# EAGLE board Arduino-SMD (EAGLE 6.6.0)
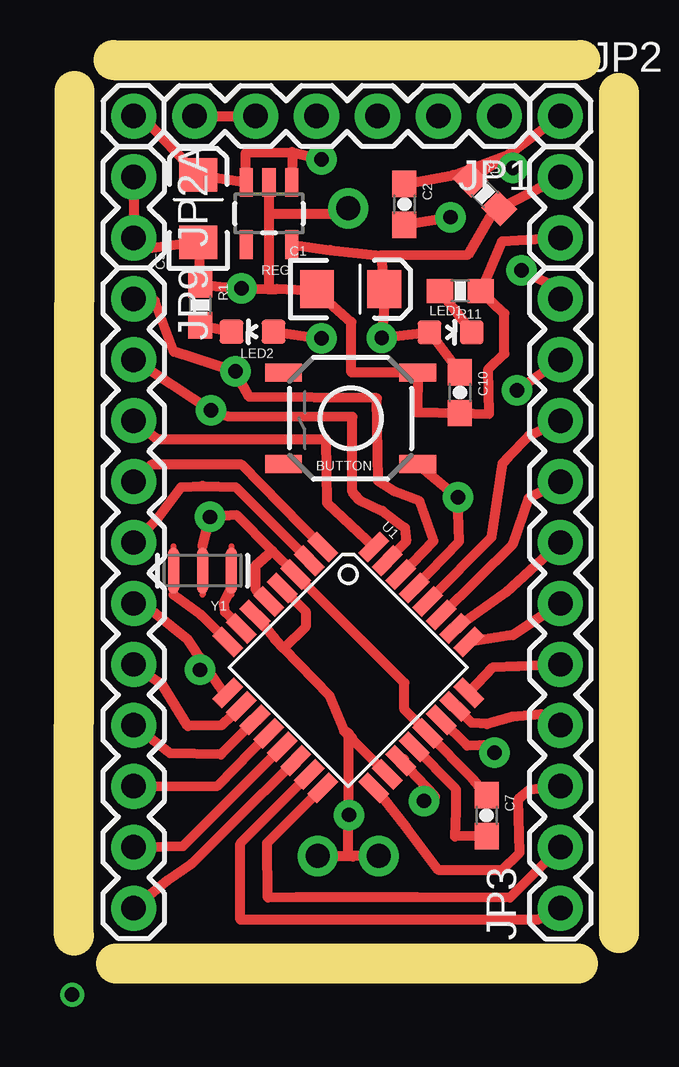
[diagram p0: board, top side]
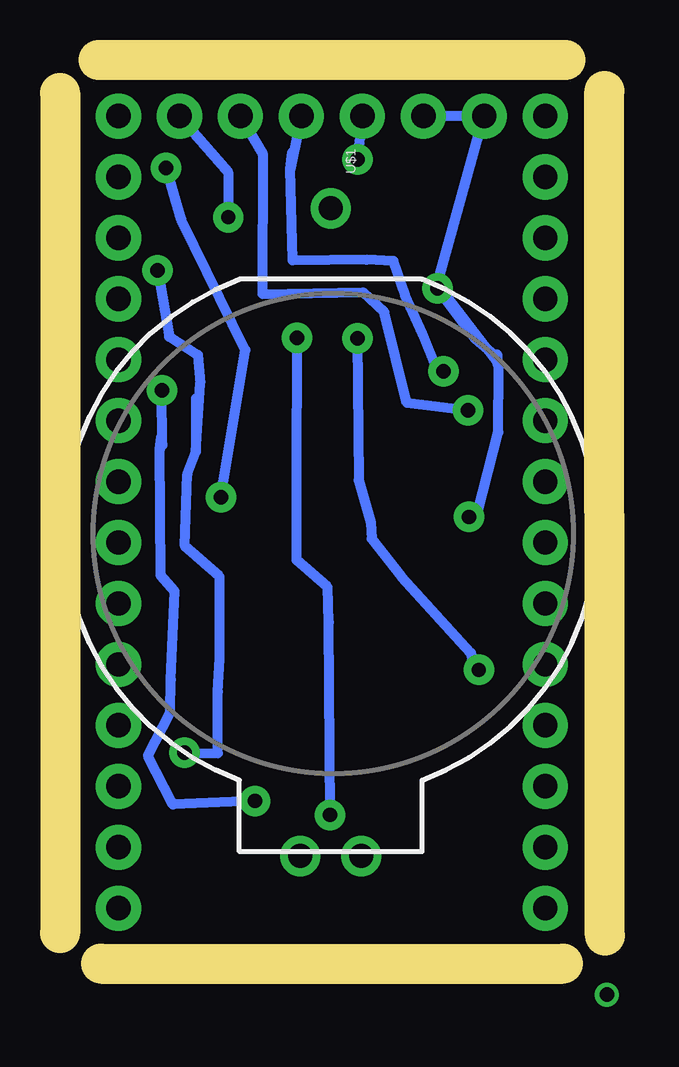
[diagram p1: board, bottom side, seen from below]

Size 22.71 x 37.67 mm. Coordinates in mm from the lower left corner, seen from the top.
Outline: 0,1.17 0.03,36.37
Outline: 1.65,37.67 21.11,37.67
Outline: 22.71,36.3 22.71,1.27
Outline: 21.01,0 1.75,0
Copper layers (1*16): Top 0.035mm / dielectric 1.5mm / Bottom 0.035mm
Design rules "default": minimum track width 10mil, minimum drill 24mil, track to track 8mil, track to pad 8mil, pad to pad 8mil, via to via 8mil, smd to smd 8mil, copper to edge 40mil, drill to drill 8mil, minimum pad ring 10mil, minimum via ring 8mil, stop-mask expansion 4mil, vias tented up to drill 0mil, thermal gap 10mil
Net classes: 0 default: width 0.203 mm; 1 vcc: width 0.254 mm

## Footprints (pad centres in the part's own frame; a part is rotated, then mirrored left to right if it is on the bottom)
TACTILE-SWITCH-SMD = smd 1.524 x 0.762: 1 -2.794,1.905; 2 2.794,1.905; 3 -2.794,-1.905; 4 2.794,-1.905
EIA3216 = smd 1.4 x 1.6: A 1.4,0; C -1.4,0
0603-CAP = smd 1.1 x 1: 1 -0.85,0; 2 0.85,0
1X06 = drill 1.016 pad 1.88: 1 0,0; 2 2.54,0; 3 5.08,0; 4 7.62,0; 5 10.16,0; 6 12.7,0
1X01 = drill 1.016 pad 1.88: 1 0,0
1X02 = drill 1.016 pad 1.88: 1 0,0; 2 2.54,0
1X11 = drill 1.016 pad 1.88: 1 0,0; 2 2.54,0; 3 5.08,0; 4 7.62,0; 5 10.16,0; 6 12.7,0; 7 15.24,0; 8 17.78,0; 9 20.32,0; 10 22.86,0; 11 25.4,0
0603-LED-ALT1 = smd 1 x 1: A 0,-0.877; C 0,0.877
0603-RES = smd 1.1 x 1: 1 -0.85,0; 2 0.85,0
SOT23-5 = smd 0.55 x 1.2: 1 -0.95,-1.3; 2 0,-1.3; 3 0.95,-1.3; 4 0.95,1.3; 5 -0.95,1.3
TQFP32-08 = smd 1.27 x 0.559: 1 -4.293,2.8; 2 -4.293,2; 3 -4.293,1.2; 4 -4.293,0.4; 5 -4.293,-0.4; 6 -4.293,-1.2; 7 -4.293,-2; 8 -4.293,-2.8; 17 4.293,-2.8; 18 4.293,-2; 19 4.293,-1.2; 20 4.293,-0.4; 21 4.293,0.4; 22 4.293,1.2; 23 4.293,2; 24 4.293,2.8 | smd 0.559 x 1.27: 9 -2.8,-4.293; 10 -2,-4.293; 11 -1.2,-4.293; 12 -0.4,-4.293; 13 0.4,-4.293; 14 1.2,-4.293; 15 2,-4.293; 16 2.8,-4.293; 25 2.8,4.293; 26 2,4.293; 27 1.2,4.293; 28 0.4,4.293; 29 -0.4,4.293; 30 -1.2,4.293; 31 -2,4.293; 32 -2.8,4.293
BATTCOM_20MM_PTH = drill 1 pad 1.676: GND -13.5,0; PWR 13.5,1.27; PWR2 13.5,-1.27
RESONATOR-SMD = smd 0.45 x 1.905: 1 -1.2,0; 2 0,0; 3 1.2,0

## Placement (x,y rotation side)
BUTTON  Button  [TACTILE-SWITCH-SMD]  11.53,22.73 180 top
C1  10uF  [EIA3216]  11.53,28.12 0 top
C2  0.1uF  [0603-CAP]  13.77,31.65 270 top
C5  10uF  [EIA3216]  5.18,31.47 90 top
C7  0.1uF  [0603-CAP]  17.2,6.17 270 top
C10  0.1uF  [0603-CAP]  16.08,23.8 270 top
JP1  FTDI Basic  [1X06]  17.73,35.33 180 top
JP2  M01PTH  [1X01]  20.27,35.33 0 top
JP2A  M02PTH  [1X02]  2.49,32.79 270 top
JP2A1  M02PTH  [1X02]  20.27,32.79 270 top
JP3  M11PTH  [1X11]  20.27,2.31 90 top
JP4  M01PTH  [1X01]  2.49,35.33 0 top
JP9  M11PTH  [1X11]  2.49,27.71 270 top
LED1  Red  [0603-LED-ALT1]  15.7,26.31 270 top
LED2  Red  [0603-LED-ALT1]  7.44,26.34 90 top
R1  10K  [0603-RES]  5.26,27.46 270 top
R2  10K  [0603-RES]  17.12,32.08 315 top
R11  10K  [0603-RES]  16.1,28.04 180 top
REG  3.3V  [SOT23-5]  8.13,31.27 180 top
U1  ATMEGA328P  [TQFP32-08]  11.43,12.34 315 top
U$1  BATTERY-ITP  [BATTCOM_20MM_PTH]  11.43,17.98 270 bottom
Y1  8MHZ  [RESONATOR-SMD]  5.36,16.38 180 top

## Library data of the parts
BUTTON U$1 = SparkFun-Electromechanical
C1 C5 = SparkFun-Capacitors
C2 C7 C10 JP1 R1 R2 R11 = SparkFun
JP2 JP2A JP2A1 JP3 JP4 JP9 = SparkFun-Connectors
LED1 LED2 = Testing
REG = SparkFun-PowerIC; PROD_ID: VREG-00822
U1 = SparkFun-DigitalIC; PROD_ID: IC-09069
Y1 = SparkFun-FreqCtrl; PROD_ID: XTAL-08895

## Nets
DTR: C2.2 JP1.1
GND [vcc]: BUTTON.3 C1.C C5.C C7.1 C10.2 JP1.5 JP1.6 JP2A1.2 JP2A.1 JP2A.2 R1.1 R11.1 REG.2 U1.3 U1.5 U1.21 U$1.GND Y1.2
N$1: U1.8 Y1.3
N$2: U1.7 Y1.1
N$4: LED1.C R11.2
N$6: JP3.1 U1.15
N$7: JP3.2 U1.16
N$8: JP3.3 U1.17
N$9: JP3.11 U1.22
N$10: JP3.10 U1.19
N$11: JP3.9 U1.28
N$12: JP3.8 U1.27
N$13: JP3.7 U1.26
N$14: JP3.6 U1.25
N$15: JP3.5 U1.24
N$16: JP3.4 U1.23
N$17: LED2.C R1.2
N$19: JP9.7 U1.10
N$21: C5.A JP1.4 JP4.1 REG.1 REG.3
N$26: JP9.3 U1.32
N$27: C7.2 U1.20
N$28: JP9.4 U1.1
N$29: JP9.5 U1.2
N$30: JP9.6 LED2.A U1.9
N$32: JP9.8 U1.11
N$33: JP9.9 U1.12
N$34: JP9.10 U1.13
N$35: JP9.11 U1.14
RESET: BUTTON.1 C2.1 JP2.1 R2.1 U1.29
RXI: JP1.3 JP9.1 U1.30
TXO: JP1.2 JP9.2 U1.31
VCC: C1.A C10.1 JP2A1.1 LED1.A R2.2 REG.5 U1.4 U1.6 U1.18 U$1.PWR U$1.PWR2

## Tracks (layer width: path | path; a pad name or v marks a point on that pad's centre or on a via)
DTR  (via drill 0.6 pad 1.27)
  Top 0.406: C2.2 v15.7,31.11
  Bottom 0.406: JP1.1 15.7,32.99 v15.7,31.11
GND  (via drill 0.6 pad 1.27)
  Top 0.406: JP1.6 JP1.5 | JP2A.1 JP2A.2 2.95,29.79 C5.C R1.1 v6.98,28.14 8.12,28.11 | C7.1 16.64,7.68 U1.21 14.75,9.61 13.77,10.59 13.77,11.7 U1.3 8.27,17.21 | U1.5 8.09,15.1 8.09,15.12 7.57,15.6 7.57,16.59 8.27,17.21 | 8.27,17.21 6.78,18.69 v5.66,18.62 5.36,17.4 | 14.35,24.61 BUTTON.3 | BUTTON.3 11.56,24.64 11.56,26.75 10.1,28.03 | C1.C 10.1,28.03 | 10.1,28.03 8.46,28.12 8.12,28.11 | REG.2 8.12,31.27 | 8.12,31.27 8.12,28.11 | BUTTON.3 14.3,22.99 C10.2 17.3,22.91 17.27,24.79 17.93,25.43 17.93,27.1 R11.1 17.83,30.1 JP2A1.2 | 8.12,31.27 11.43,31.27 U$1.GND
  Bottom 0.406: JP1.5 5.05,35.33 6.98,28.32 4.42,24.99 4.48,24.98 | 4.48,24.98 4.5,25.4 4.42,24.87 4.44,22.15 5.31,18.82 v5.66,18.62 | 4.48,24.98 4.47,25.25 5.41,26.03 v6.98,28.14
N$1
  Top 0.406: U1.8 6.41,13.42 5.31,14.53 5.3,14.53 4.16,15.37
N$2
  Top 0.406: U1.7 6.3,14.66 6.25,15.03 6.58,15.67
N$4
  Top 0.406: R11.2 LED1.C
N$6
  Top 0.406: JP3.1 19.33,1.83 6.93,1.83 6.93,5 9.8,7.89 U1.15
N$7
  Top 0.406: JP3.2 18.16,2.74 14.3,2.77 9.27,2.77 8.08,2.74 8.05,5.03 9.5,6.48 10.03,7.01 U1.16
N$8
  Top 0.406: U1.17 12.59,7.28 13.87,5.64 15.16,3.91 17.86,3.91 18.57,4.62 18.52,6.86 19,7.26 JP3.3
N$9  (via drill 0.6 pad 1.27)
  Top 0.406: U1.22 16.39,9.09 17.32,9.14 17.3,9.02 17.53,9.02 v17.53,8.79 | v18.64,28.91 20.45,28.03 | 20.45,28.03 20.19,27.56 | JP3.11 20.27,27.65 20.45,28.03
  Bottom 0.406: v17.53,8.79 16.13,8.76 16.13,11.33 16.05,12.73 16.05,16.13 17.5,17.4 17.4,20.4 17.05,21.33 | 17.04,23.57 17.05,21.33 | 17.05,21.33 16.87,24.18 16.97,25.37 18.16,26.14 v18.64,28.91
N$10  (via drill 0.6 pad 1.27)
  Top 0.406: 13.74,8.53 U1.19 15.04,6.96 v14.58,6.78 | v18.47,23.9 20.24,25.15 JP3.10
  Bottom 0.406: v18.47,23.9 18.44,21.62 18.49,21.95 18.54,21.44 18.52,16.18 17.93,15.52 18.08,11.84 18.11,10.46 19.05,8.66 18.01,6.63 v14.58,6.78
N$11
  Top 0.406: U1.28 17.41,17.78 17.86,20.86 18.11,21.13 18.95,22 JP3.9
N$12
  Top 0.406: U1.27 18.28,17.48 18.94,19.4 JP3.8
N$13
  Top 0.406: U1.26 17.99,15.47 JP3.7
N$14
  Top 0.406: U1.25 18.29,13.69 JP3.6
N$15
  Top 0.406: JP3.5 20.24,12.47 18.52,12.4 17.45,12.34 U1.24
N$16
  Top 0.406: JP3.4 19.81,9.96 19.46,10.39 18.26,10.29 17.22,9.98 16.57,10.03 U1.23
N$17
  Top 0.406: R1.2 LED2.C
N$19
  Top 0.406: U1.10 6.15,9.93 4.75,9.91 3.68,11.63 2.67,12.29 JP9.7
N$20  (via drill 0.6)
  other vias: -0.08,-1.3
N$21  (via drill 0.6 pad 1.27)
  Top 0.406: JP4.1 2.82,35.33 C5.A REG.3 7.16,33.81 9.09,33.83 | 9.09,33.83 REG.1 | 9.09,33.83 v10.31,33.53
  Bottom 0.406: JP1.4 v10.31,33.53
N$26
  Top 0.406: JP9.3 3.48,21.87 10.49,21.87 10.54,19.2 U1.32
N$27
  Top 0.406: C7.2 15.89,5.3 15.93,6.35 15.93,7.26 U1.20
N$28
  Top 0.406: U1.1 10.35,17.36 6.98,20.8 3.23,20.8 JP9.4
N$29
  Top 0.406: JP9.5 2.54,17.55 2.79,17.86 3.48,18.54 4.47,19.86 5.36,19.91 6.74,19.86 U1.2
N$30  (via drill 0.6 pad 1.27)
  Top 0.406: JP9.6 3.4,14.6 4.7,13.56 | 4.7,13.56 5.31,12.65 6.3,11.18 U1.9 | v5.26,12.24 5.44,12.45 4.7,13.56 | 10.22,26.12 v10.31,26.06 LED2.A
  Bottom 0.406: v10.31,26.06 10.26,20.14 9.75,18.39 9.73,17.7 8.48,16.13 5.59,12.95 5.44,12.09 v5.26,12.24
N$32
  Top 0.406: U1.11 7.57,10.18 6.12,8.71 4.01,8.76 JP9.8
N$33
  Top 0.406: JP9.9 5.99,7.42 U1.12
N$34
  Top 0.406: JP9.10 4.55,4.9 U1.13
N$35
  Top 0.406: U1.14 6.55,5.8 4.9,4.17 3.91,3.48 JP9.11
RESET  (via drill 0.6 pad 1.27)
  Top 0.406: R2.1 18,33.66 | 18,33.66 18.13,33.75 | 18.13,33.75 JP2.1 | U1.29 16.05,17.6 v16,19.43 BUTTON.1 | C2.1 15.8,32.87 18.13,33.75 | v18.29,33.17 18,33.66
  Bottom 0.406: v16,19.43 14.99,25.58 17.65,31.01 v18.29,33.17
RXI  (via drill 0.6 pad 1.27)
  Top 0.406: U1.30 13.64,16.23 14.99,17.63 14.4,19.28 13.36,19.68 12.67,20.12 12.62,23.57 7.31,23.62 v6.73,24.69 4.17,25.5 3.38,27.64 JP9.1
  Bottom 0.406: JP1.3 13.11,33.12 | 13.11,33.12 13.03,33.83 | v6.73,24.69 6.98,24.74 7.59,26.24 8.33,27.84 8.81,29.29 9.93,29.34 13.01,29.31 13.11,33.12
TXO  (via drill 0.6 pad 1.27)
  Top 0.406: U1.31 13.84,17.59 13.79,18.16 12.85,18.87 11.89,19.33 11.61,19.66 11.61,22.78 6.43,22.81 v5.71,23.06 JP9.2
  Bottom 0.406: JP1.2 14.25,33.73 14.27,27.91 10.08,27.99 9.19,27.15 8.25,23.37 v5.71,23.06
VCC  (via drill 0.6 pad 1.27)
  Top 0.406: U1.6 8.38,13.51 8.75,13.13 | 8.75,13.13 10.64,11.18 11.25,9.74 | U1.4 9.65,14.68 9.65,14.03 8.75,13.13 | 13.13,7.85 U1.18 11.25,9.69 11.25,9.74 | 11.58,9.41 11.46,9.59 | 11.46,9.59 11.25,9.74 | 11.43,4.5 11.62,4.46 11.62,4.48 U$1.PWR2 | 11.43,4.5 11.43,6.02 v11.46,6.2 11.46,9.59 | 12.8,26.06 v12.83,26.09 | 12.79,29.52 10.67,29.74 REG.5 | 12.79,29.52 12.88,28.69 12.98,27.94 | 12.98,27.94 C1.A | v12.83,26.09 LED1.A C10.1 | 12.98,27.94 v12.83,26.09 | JP2A1.1 R2.2 17.32,31.11 16.41,29.54 12.79,29.52 | U$1.PWR 11.43,4.48 11.43,4.5
  Bottom 0.406: v11.46,6.2 11.51,14.22 11.56,15.7 12.85,16.81 12.85,20.19 v12.83,26.09

## Text on the board
Document: Vin / GND / GND / D0 / D1 / D2 / D3 / D4 / D5 / D6 / D7 / D8 / D9 / D10 | RESET / 3.3V / GND / A7 / A6 / A5 / A4 / A3 / A2 / A1 / A0 / D13 / D12 / D11